# Altium PCB Count_3x7Seg_Display_pcb.PcbDoc
Units mil, origin at the board's own origin, x right, y up, seen from the top; angles counter-clockwise.
Board outline 1763 x 2600 mil, 4 copper layers (Top Layer 1, Layer 2 (PWR), Layer 3 (GND), Bottom Layer 1), stack 75.712 mil thick; 47 components, 41 nets, 162 pads, 23 vias.
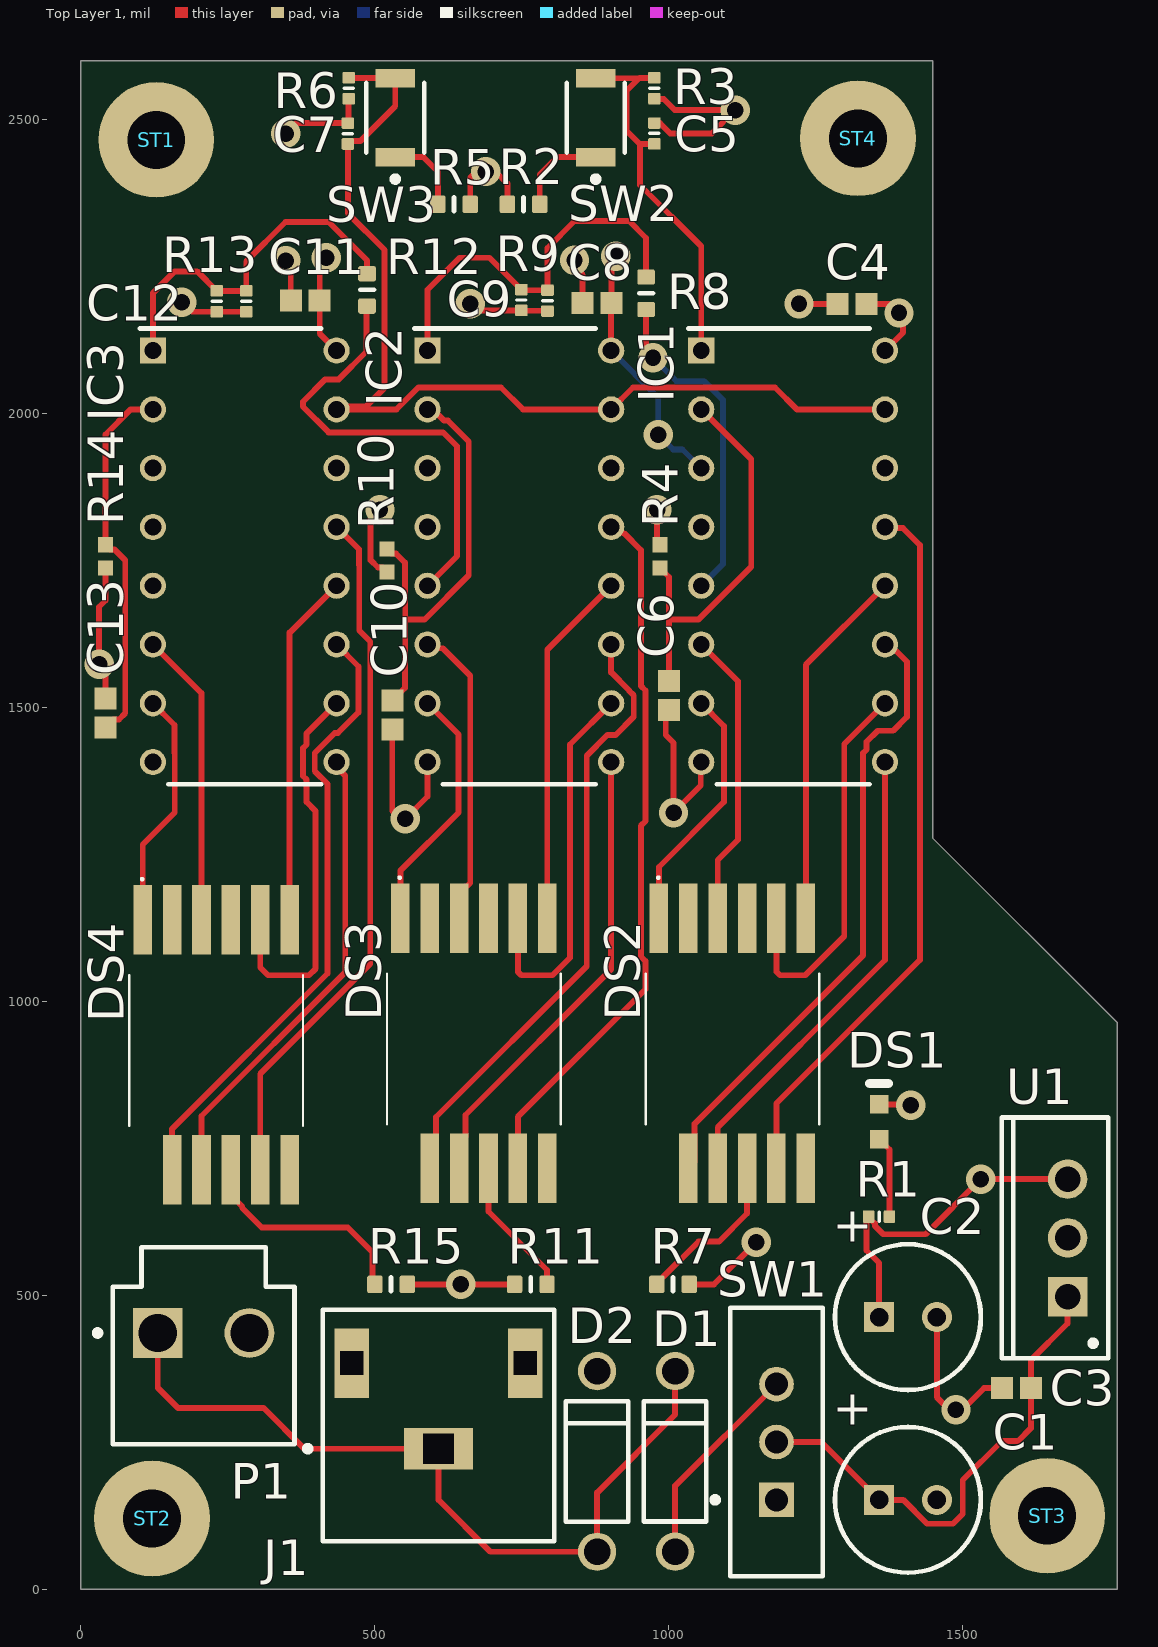
[diagram p0: Top Layer 1 view]
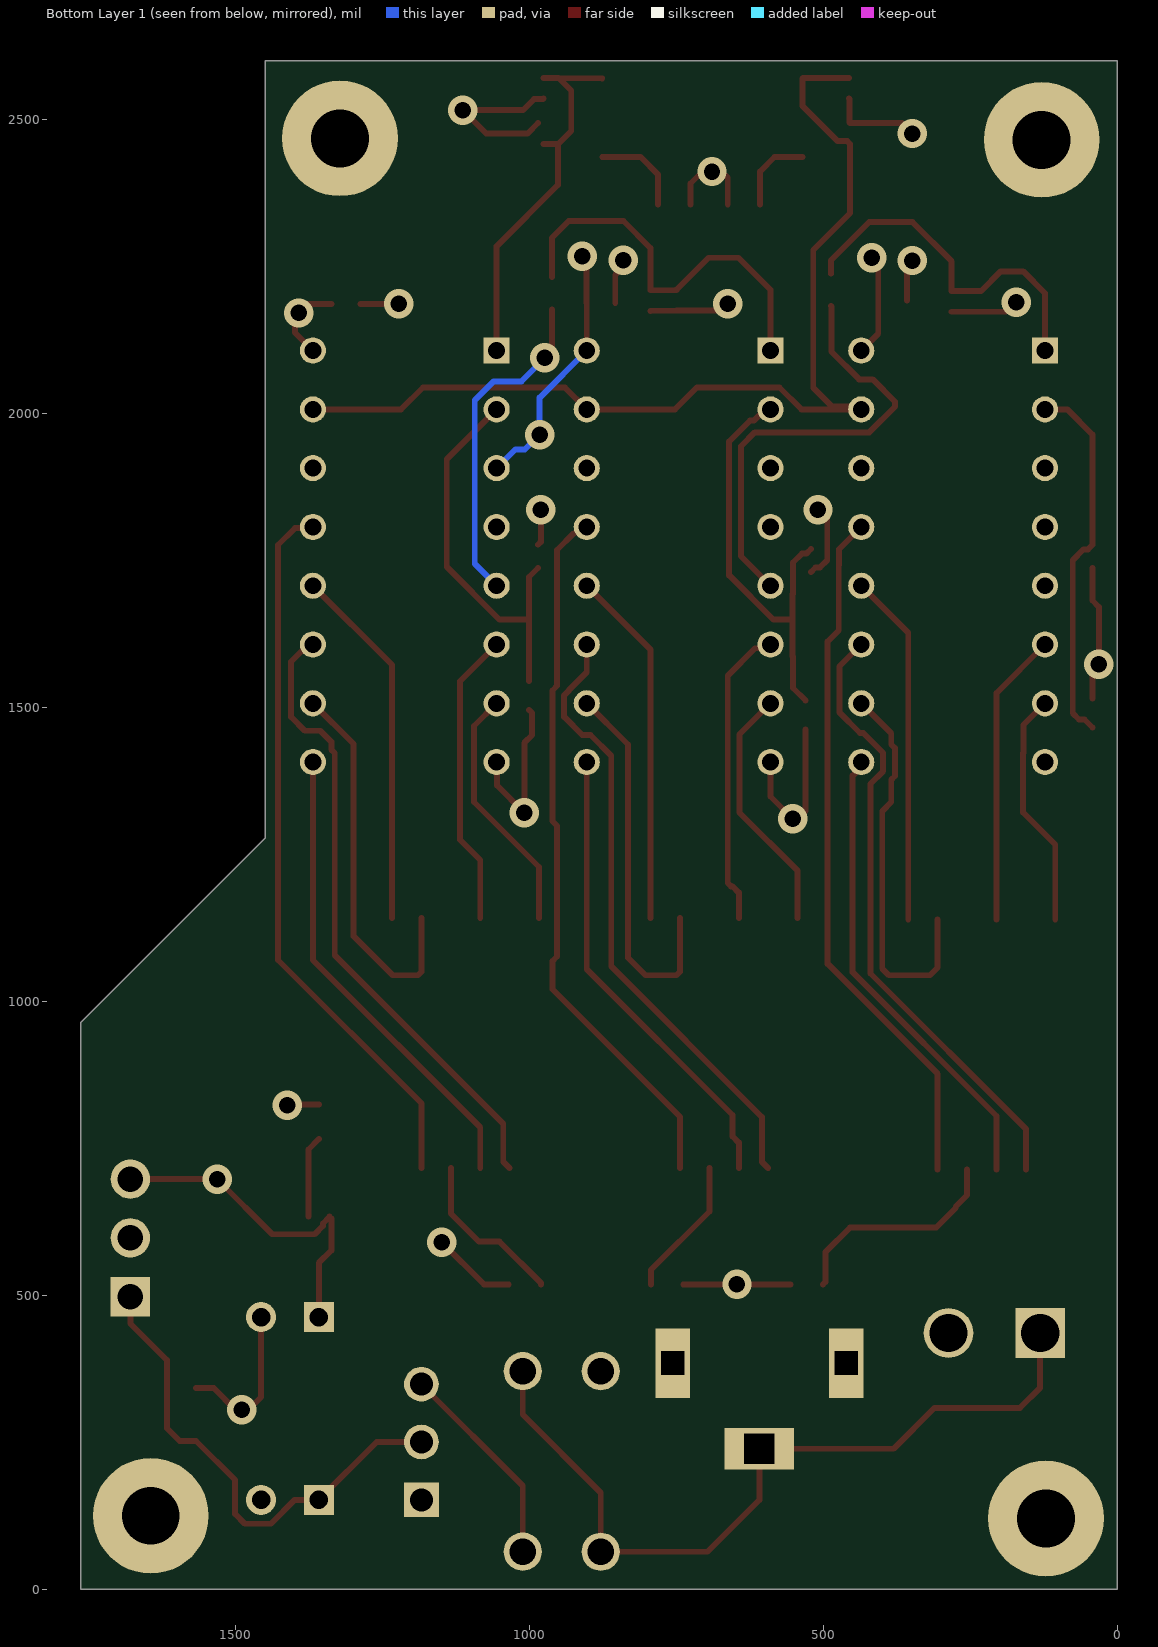
[diagram p1: Bottom Layer 1 view, seen from below]
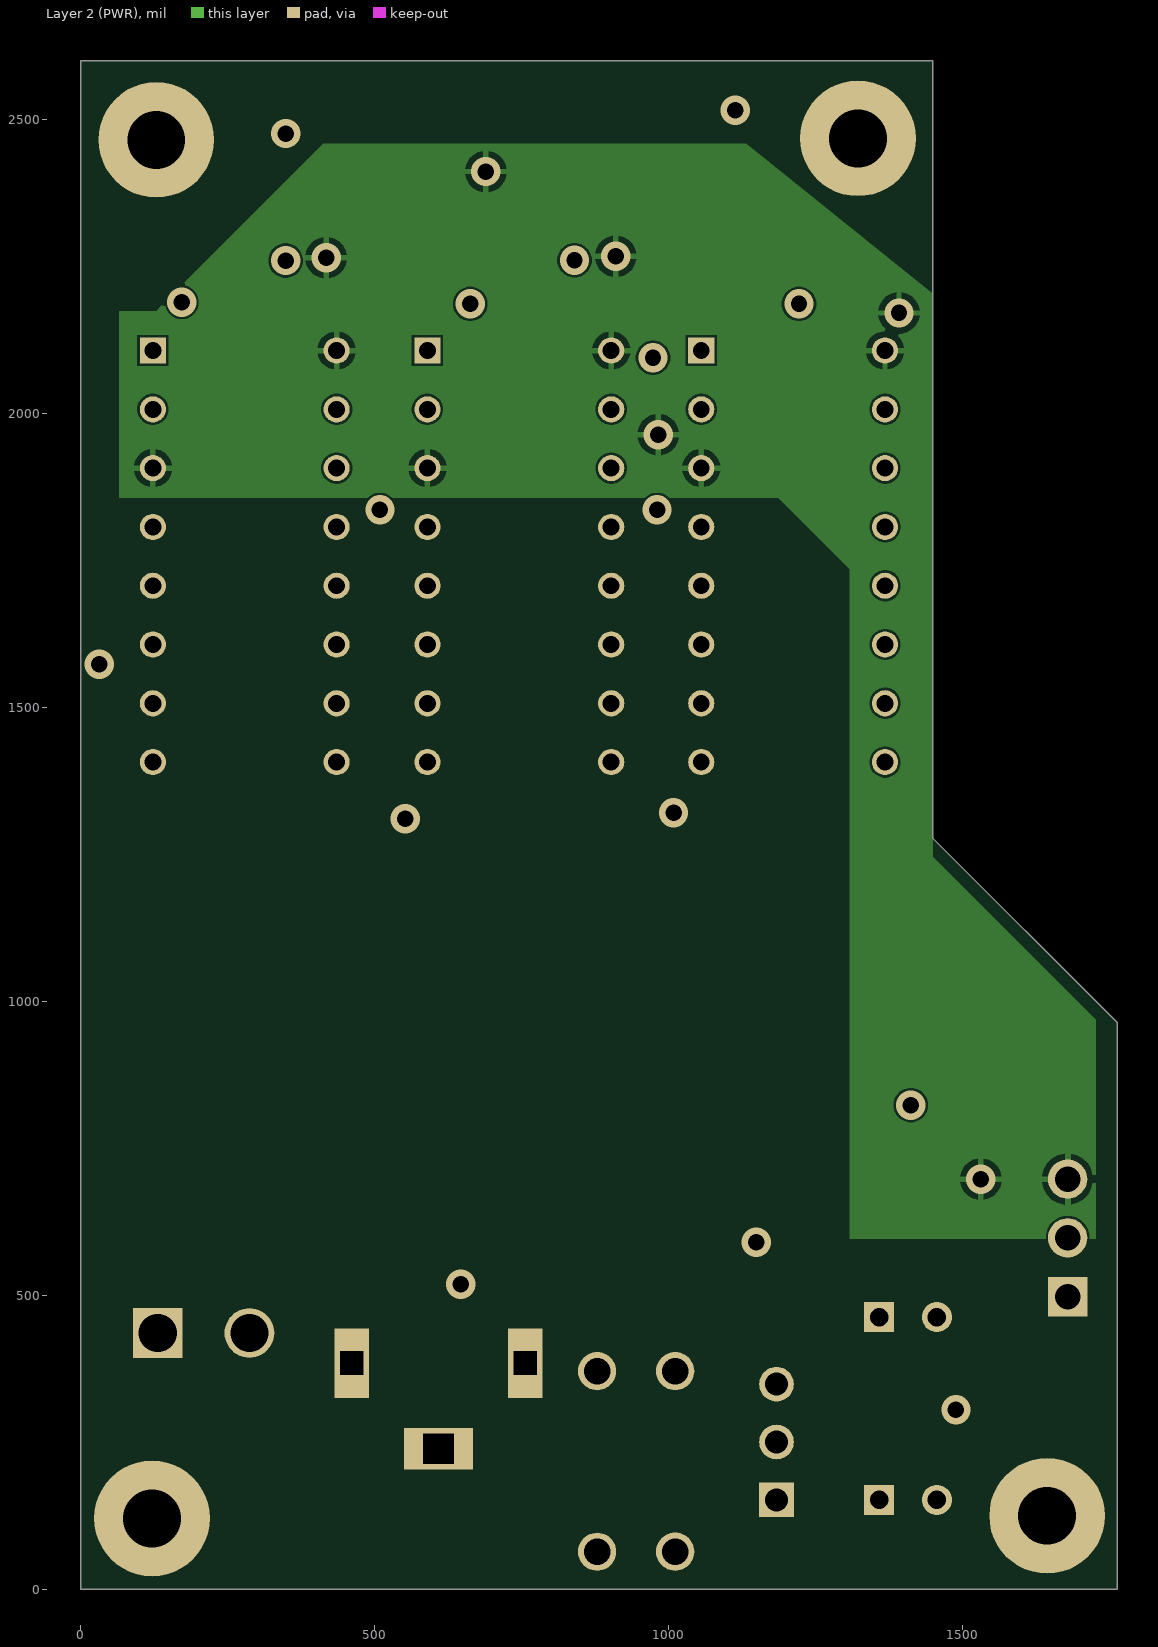
[diagram p2: Layer 2 (PWR)]
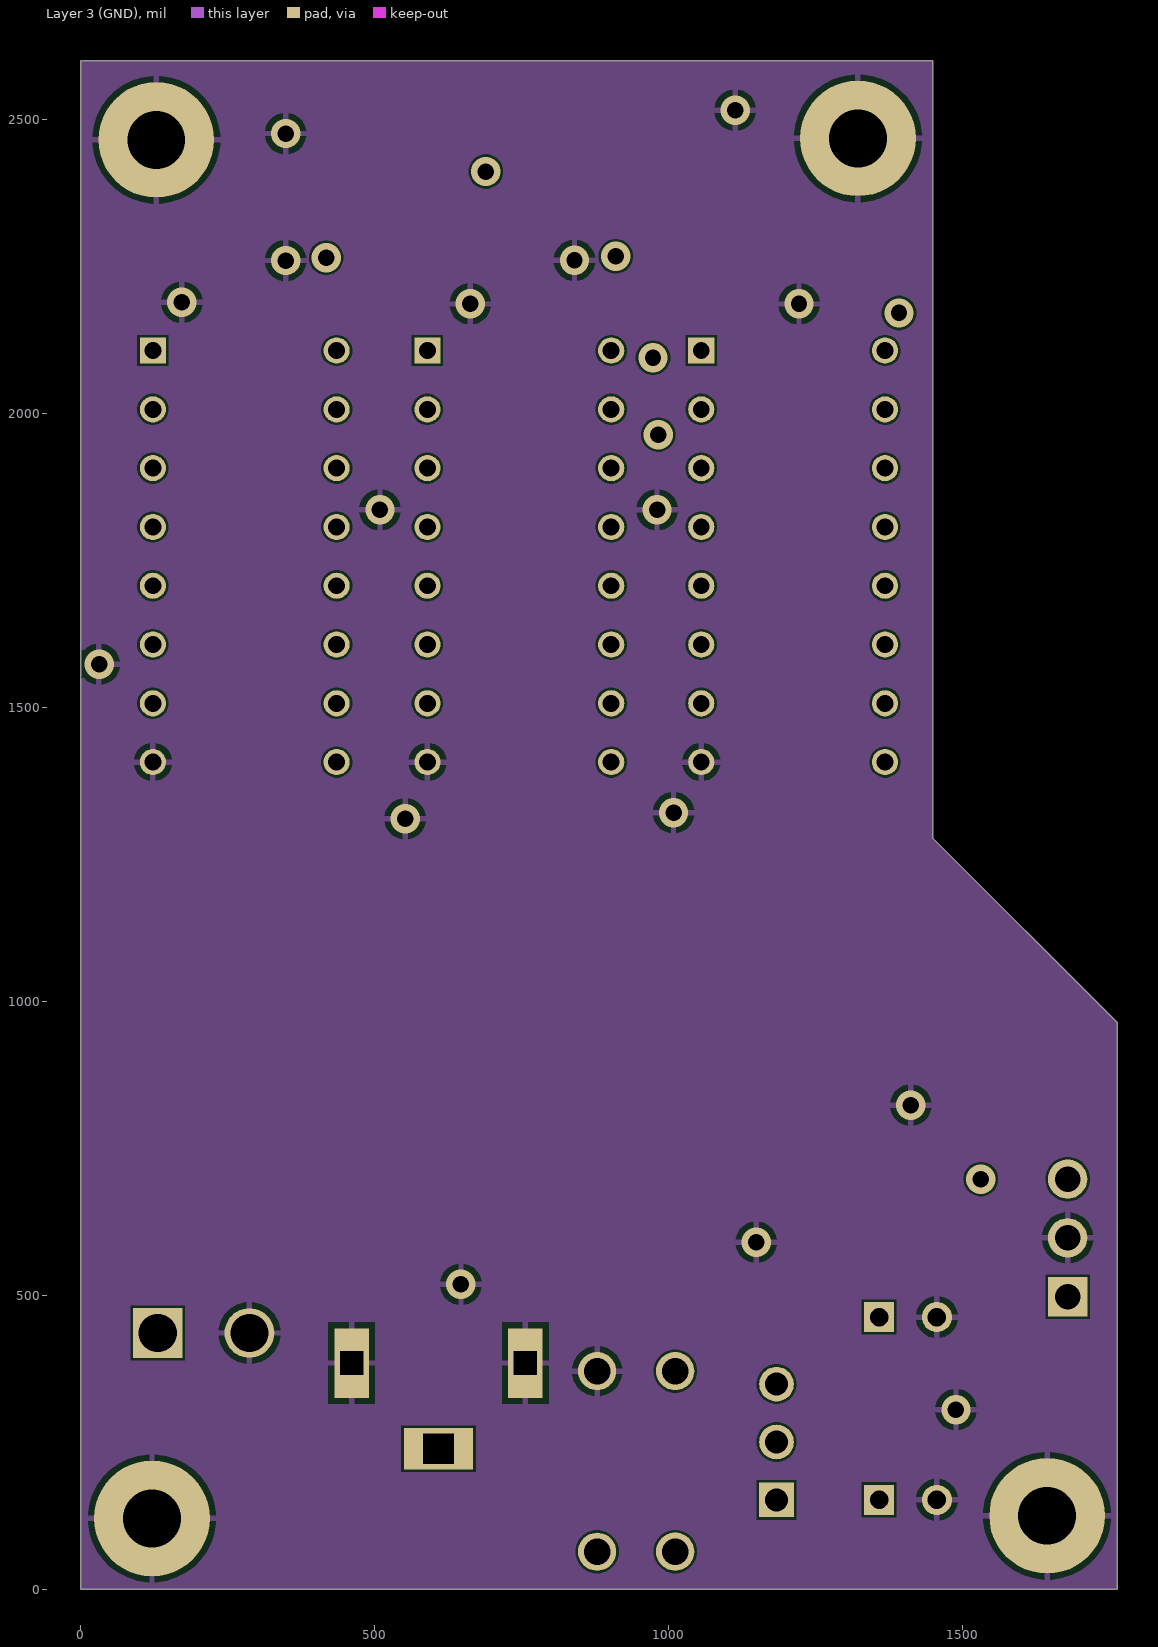
[diagram p3: Layer 3 (GND)]
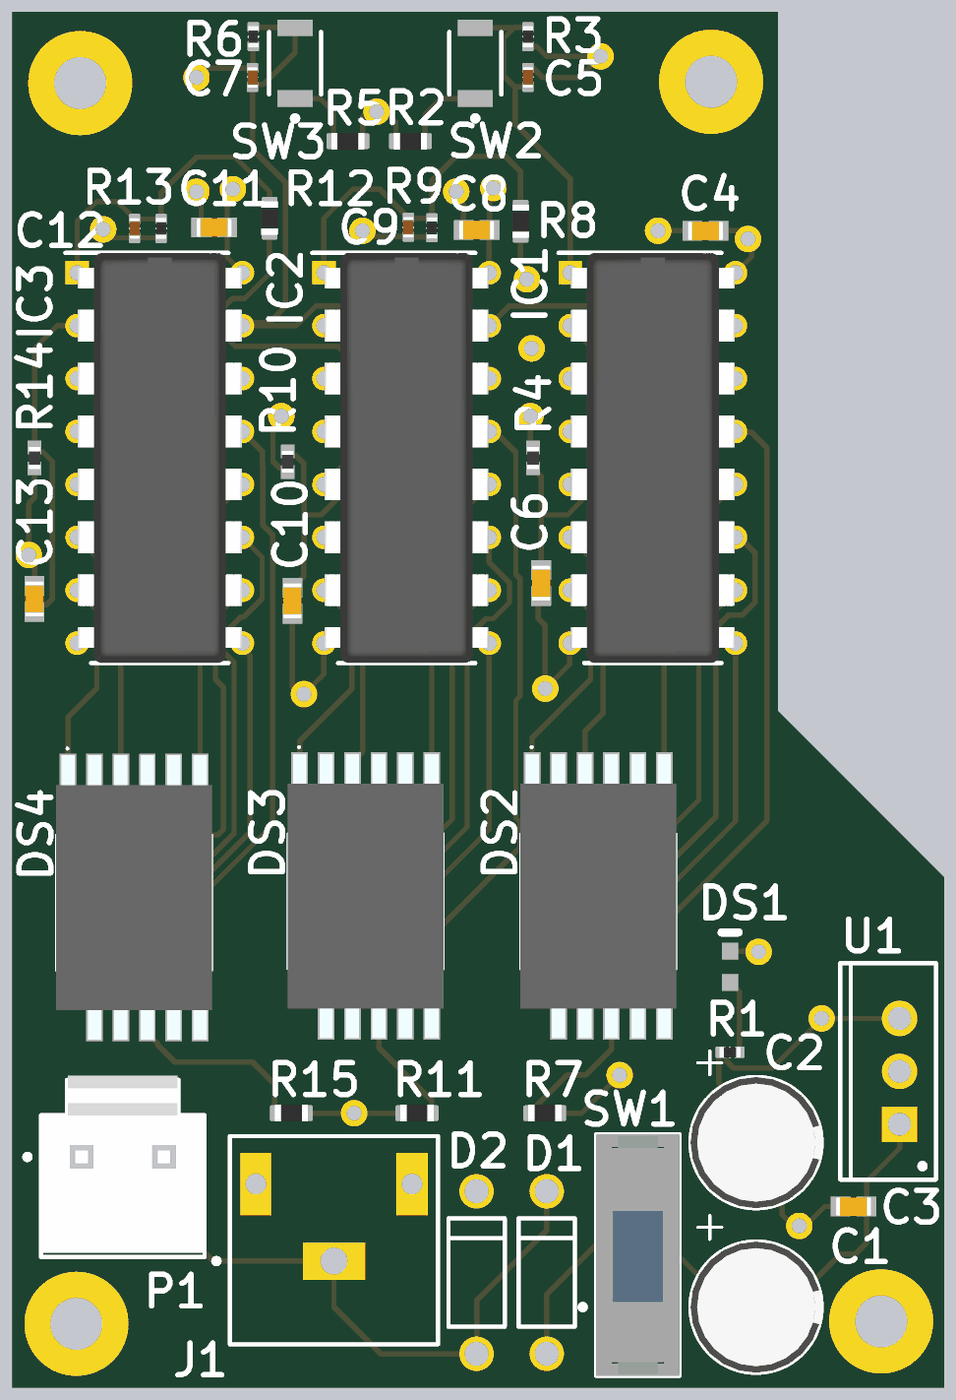
[diagram p4: 3D render of the assembled board from above, using the file's embedded part models]

## Layer stack, top to bottom
Top Solder: solder mask 0.5, Solder Resist, Dk 3.3
Top Layer 1: signal copper 1.378
Dielectric 3: prepreg 2.8, PP-006, Dk 4.1
Dielectric 1: prepreg 2.8, PP-006, Dk 4.1
Layer 2 (PWR): signal copper 1.378
Dielectric1: core 59, FR-4, Dk 4.3
Layer 3 (GND): signal copper 1.378
Dielectric 2: prepreg 2.8, PP-006, Dk 4.1
Dielectric 4: prepreg 2.8, PP-006, Dk 4.1
Bottom Layer 1: signal copper 1.378
Bottom Solder: solder mask 0.5, Solder Resist, Dk 3.3

## Board outline
1449,2600 1449,1278 1763,964 1763,0 0,0 0,2600

## Design rules (kind name [scope] priority, off if disabled: settings)
Clearance Clearance_1 [(ExistsOnLayer('Layer 2 (PWR)') Or ExistsOnLayer('Layer 3 (GND)')) vs (ExistsOnLayer('Layer 2 (PWR)') Or ExistsOnLayer('Layer 3 (GND)'))] p1: gap=4 ignorepadtopadclearanceinfootprint=FALSE sourcerule=36 cellrowname=All cellrowtype=0 cellcolname=All cellcoltype=0 innerlayers=TRUE
Clearance Clearance_2 [(ExistsOnLayer('Top Layer 1') Or ExistsOnLayer('Bottom Layer 1')) vs (ExistsOnLayer('Top Layer 1') Or ExistsOnLayer('Bottom Layer 1'))] p2: gap=4 ignorepadtopadclearanceinfootprint=FALSE sourcerule=36 cellrowname=All cellrowtype=0 cellcolname=All cellcoltype=0 outerlayers=TRUE
Clearance [All] p3: gap=10 ignorepadtopadclearanceinfootprint=FALSE except(0: Arc-Hole Track-Hole SMDPad-Hole THPad-Hole Via-Hole Fill-Hole Poly-Hole Region-Hole Text-Hole)
ComponentClearance [All] p1: gap=4 collisioncheckmode=3 verticalgap=10 showdistances=FALSE
HoleToHoleClearance [All] p1: gap=6 allowstackedmicrovias=TRUE
MinimumSolderMaskSliver [All] p1: minsoldermaskwidth=6
PlaneClearance [All] p1: clearance=6
PolygonConnect [All] p1: connectstyle=Relief reliefconductorwidth=10 reliefentries=4 polygonreliefangle="90 Angle" airgapwidth=10
RoutingCorners [All] p1: cornerstyle=45-Degree minsetback=1 maxsetback=100
RoutingVias [All] p1: holewidth=28 width=50 viastyle="Through Hole" minholewidth=28 minwidth=50 maxholewidth=28 maxwidth=50
SilkToSilkClearance [All] p1: silktosilkclearance=1
SilkToSolderMaskClearance [IsPad] p1: minsilkscreentomaskgap=1 clearancetoexposedcopper=TRUE
SolderMaskExpansion [All] p1: expansion=0 istentingtop=FALSE
Width [All] p1: maxlimit=10 minlimit=10 preferedwidth=10
23 further rules are at their usual default settings.

## Components (designator, comment, footprint, x,y, rotation, side; value= is the part's Value field where it differs from the comment)
C1 "ECA-1HM470" CAPPR55-250-1120X630X1220 1407.08,152.11 r0 top value=220µF/16V
C2 "ECA-1HM470" CAPPR55-250-1120X630X1220 1407.08,463 r0 top value=0.1µF/10V
C3 "Capacitor 100 nF +/-10% 50 V 0603" CAPC1608X90X40NL10T20 1591.53,342.32 r0 top value=100nF
C4 "Capacitor 100 nF +/-10% 50 V 0603" CAPC1608X90X40NL10T20 1311.56,2186.28 r0 top value=100nF
C5 "Capacitor 220nF +/-20% 10V 0402" CAPC0402(1005)60_L 975.7,2476.27 r270 top value=220nF
C6 "Capacitor 100 nF +/-10% 50 V 0603" CAPC1608X90X40NL10T20 1000.64,1520.5 r90 top value=100nF
C7 "Capacitor 220nF +/-20% 10V 0402" CAPC0402(1005)60_L 454.36,2476.11 r270 top value=220nF
C8 "Capacitor 100 nF +/-10% 50 V 0603" CAPC1608X90X40NL10T20 878.39,2187.84 r0 top value=100nF
C9 "Capacitor 220nF +/-20% 10V 0402" CAPC0402(1005)60_L 749.39,2193 r90 top value=220nF
C10 "Capacitor 100 nF +/-10% 50 V 0603" CAPC1608X90X40NL10T20 529.95,1487.04 r90 top value=100nF
C11 "Capacitor 100 nF +/-10% 50 V 0603" CAPC1608X90X40NL10T20 381.94,2192.4 r0 top value=100nF
C12 "Capacitor 220nF +/-20% 10V 0402" CAPC0402(1005)60_L 231.39,2190.73 r90 top value=220nF
C13 "Capacitor 100 nF +/-10% 50 V 0603" CAPC1608X90X40NL10T20 42.02,1490.5 r270 top value=100nF
D1 "1N4007" FAIR-DO-41-2 1011.14,217.55 r90 top
D2 "1N4007" FAIR-DO-41-2 878.38,217.45 r90 top
DS1 "LTST-C190GKT" LTST-C190GKT_V 1357.87,795.31 r90 top
DS2 "HDSM-281C" HDSM283L 1108.46,928.98 r0 top
DS3 "HDSM-281C" HDSM283L 668.61,928.98 r0 top
DS4 "HDSM-281C" HDSM283L 230.44,926.37 r0 top
IC1 "CD4026BE" DIP794W53P254L1930H508Q16N 1211.82,1756.98 r0 top
IC2 "CD4026BE" DIP794W53P254L1930H508Q16N 745.99,1756.98 r0 top
IC3 "CD4026BE" DIP794W53P254L1930H508Q16N 279.01,1756.98 r0 top
J1 "PJRAN1X1U01X" SWIT-PJRAN1X1U01X_V 608.56,239.13 r0 top
P1 "B2P-VH(LF)(SN)" JST-B2P-VH(LF)(SN)_V 209,380.84 r0 top
R1 "200R2J" RESC0402(1005)_L 1357.87,633.84 r0 top value=200
R2 "120R3J" RESC0603(1608)_L 753.23,2355.63 r0 top value=120
R3 "Resistor 2K +/-5 % 0402 63 mW" RESC0402(1005)_L 975.7,2553.19 r90 top value=2k
R4 "Resistor 10k +/-1% 0402 100 mW" RESC1005X40X25ML05T05 985.23,1756.98 r90 top value=10k
R5 "120R3J" RESC0603(1608)_L 634.98,2355.63 r180 top value=120
R6 "Resistor 2K +/-5 % 0402 63 mW" RESC0402(1005)_L 455.98,2553.19 r90 top value=2k
R7 "120R3J" RESC0603(1608)_L 1007.45,518.63 r0 top value=120
R8 "120R3J" RESC0603(1608)_L 961.61,2204.41 r270 top value=120
R9 "Resistor 2K +/-5 % 0402 63 mW" RESC0402(1005)_L 793.88,2191.86 r90 top value=2k
R10 "Resistor 10k +/-1% 0402 100 mW" RESC1005X40X25ML05T05 520.98,1749.74 r270 top value=10k
R11 "120R3J" RESC0603(1608)_L 765.62,518.63 r180 top value=120
R12 "120R3J" RESC0603(1608)_L 486.97,2210.12 r270 top value=120
R13 "Resistor 2K +/-5 % 0402 63 mW" RESC0402(1005)_L 281.59,2190.73 r90 top value=2k
R14 "Resistor 10k +/-1% 0402 100 mW" RESC1005X40X25ML05T05 42.02,1756.98 r270 top value=10k
R15 "120R3J" RESC0603(1608)_L 527.87,518.63 r180 top value=120
ST1 "PTH-M2D5X5" PTH-M2D5X5 128.51,2465.44 r0 top
ST2 "PTH-M2D5X5" PTH-M2D5X5 121.27,120.58 r0 top
ST3 "PTH-M2D5X5" PTH-M2D5X5 1643.81,125.03 r0 top
ST4 "PTH-M2D5X5" PTH-M2D5X5 1322,2467.93 r0 top
SW1 "EG1218" ESWI-EG1218_V 1183.46,250.53 r90 top
SW2 "B3U-1000P" OMRON-B3U-1000_V 875.91,2503 r90 top
SW3 "B3U-1000P" OMRON-B3U-1000_V 534.97,2503 r90 top
U1 "L7805CV" TO220 1678.59,597.73 r90 top

## Footprints (in the part's own frame and the unit in brackets; to place one, negate y for a bottom-side part, rotate by r counter-clockwise, add the part's x,y. Pads: shape width x height; smd on the part's side, far side on the other; paste and mask are expansions set on the pad)
CAPC0402(1005)60_L [mm] "Chip Capacitor, Body 1.0x0.5mm, Height 0.6mm, IPC High Density"
  rrect25% 0.5x0.55 smd: 1(-0.45,0) 2(0.45,0)
  silkscreen extent 0,-0.2 0,0.2, body extent -0.5,-0.25 0.5,0.25, height 0.6
CAPC1608X90X40NL10T20 [mm] "Chip Capacitor, 2-Leads, Body 1.70x0.90mm, IPC Medium Density"
  rect 0.95x0.95 smd: 1(-0.625,0) 2(0.625,0)
  body extent -0.85,-0.45 0.85,0.45, height 0.9
CAPPR55-250-1120X630X1220 [mm] "THD, 2-Leads, Dia 6.3mm, Pin Spacing 2.5mm"
  rect 1.3x1.3 hole 0.8: 1(-1.25,0)
  round 1.3 hole 0.8: 2(1.25,0)
  silkscreen extent -3.15,-3.15 3.15,3.15, body extent -3.15,-3.15 3.16,3.15, height 12.21
DIP794W53P254L1930H508Q16N [mm]
  rect 1.13x1.13 hole 0.73: 1(-3.97,8.89)
  round 1.13 hole 0.73: 2(-3.97,6.35) 3(-3.97,3.81) 4(-3.97,1.27) 5(-3.97,-1.27) 6(-3.97,-3.81) 7(-3.97,-6.35) 8(-3.97,-8.89) 9(3.97,-8.89) 10(3.97,-6.35) 11(3.97,-3.81) 12(3.97,-1.27) 13(3.97,1.27) 14(3.97,3.81) 15(3.97,6.35) 16(3.97,8.89)
  silkscreen extent -4.53,-9.84 3.3,9.84, body extent -3.94,-9.84 3.94,9.84, height 5.27
ESWI-EG1218_V [mm] "THD, 3-Leads, Body 11.6x4mm, Pitch 2.5mm"
  rect 1.5x1.5 hole 1: 1(-2.5,0)
  round 1.5 hole 1: 2(0,0) 3(2.5,0)
  silkscreen extent -5.8,-2 5.8,2.77, body extent -5.8,-2 5.8,2, height 7.4
FAIR-DO-41-2 [mm] "THD, 2-Leads, Body 5.2x2.72mm, Pin Spacing 7.8mm"
  round 1.65 hole 1.15: 1(-3.9,0) 2(3.9,0)
  silkscreen extent -2.6,-1.35 2.6,1.35, body extent -4.29,-1.17 4.29,1.17, height 2.35
HDSM283L [mm]
  rect 0.8x3 smd: 1(-3.175,5.4) 2(-1.905,5.4) 3(-0.635,5.4) 4(0.635,5.4) 5(1.905,5.4) 6(3.175,5.4) 7(3.175,-5.4) 8(1.905,-5.4) 9(0.635,-5.4) 10(-0.635,-5.4) 11(-1.905,-5.4)
  silkscreen extent -3.75,-3.5 3.75,7.2, body extent -3.75,-6.82 3.75,6.82, height 3.25
JST-B2P-VH(LF)(SN)_V [mm] "THD, 2-Leads, Body 8.5x7.86mm, Pitch 3.96mm"
  rect 2.15x2.15 hole 1.65: 1(-1.98,1.4)
  round 2.15 hole 1.65: 2(1.98,1.4)
  silkscreen extent -4.7,-3.4 3.93,5.1, body extent -3.93,-3.2 3.93,5.3, height 10.9
LTST-C190GKT_V [mm] "SMD, 2-Leads, Body 1.6x0.8mm"
  rect 0.8x0.8 smd: 1(-0.75,0) 2(0.75,0)
  silkscreen extent 1.65,-0.4 1.65,0.4, body extent -0.8,-0.4 0.8,0.4, height 0.9
OMRON-B3U-1000_V [mm] "SMD, 2-Leads, Body 3x2.5mm"
  rect 0.8x1.7 smd: 1(-1.7,0) 2(1.7,0)
  silkscreen extent -2.77,-1.25 1.5,1.25, body extent -1.5,-1.25 1.5,1.25, height 1.75
PTH-M2D5X5 [mm]
  round 5 hole 2.5: 1(0,0)
RESC0402(1005)_L [mm] "Chip Resistor, Body 1.0x0.5mm, IPC High Density"
  rrect25% 0.5x0.55 smd: 1(-0.45,0) 2(0.45,0)
  silkscreen extent 0,-0.2 0,0.2, body extent -0.5,-0.25 0.5,0.25, height 0.3
RESC0603(1608)_L [mm] "Chip Resistor, Body 1.6x0.8mm, IPC High Density"
  rrect25% 0.66x0.76 smd: 1(-0.7,0) 2(0.7,0)
  silkscreen extent 0,-0.3 0,0.3, body extent -0.8,-0.4 0.8,0.4, height 0.45
RESC1005X40X25ML05T05 [mm] "Chip Resistor, 2-Leads, Body 1.05x0.55mm, IPC Low Density"
  rect 0.65x0.65 smd: 1(-0.5,0) 2(0.5,0)
  body extent -0.53,-0.28 0.53,0.28, height 0.4
SWIT-PJRAN1X1U01X_V [mm] "Jack, 3-Leads, Body 19.5x10mm"
  rect 3x1.8 hole 1.3 square paste-2539.97: 1(0,0)
  rect 1.5x3 hole 1 square paste-2539.97: 2(-3.75,3.7) 3(3.75,3.7)
  silkscreen extent -5.77,-4 5,6, body extent -5,-13.5 5,6, height 13
TO220 [mm] "TO, Thru-Hole, Vertical, Heatsink Mounted; 3 In-Line Leads; Pitch 2.54 mm"
  rect 1.7x1.7 hole 1.1: 1(-2.54,0)
  round 1.7 hole 1.1: 2(0,0) 3(2.54,0)
  silkscreen extent -5.2,-1.75 5.2,2.85, body extent -5.25,-1.8 5.25,2.9, height 19.7

## Part data
C1 C2: library part CMP-001-00031-7, "Aluminum Electrolytic Capacitor, 47 uF, +/-20%, 50 V, -40 to 85 degC, 2-Pin THD, RoHS, Bulk", Capacitor Type=Electrolytic, Case/Package=Radial, Manufacturer=Panasonic, Max Operating Temperature=85°C, Min Operating Temperature=-40°C, Package Description="2-Pin Radial Lead, Dia 6.3 mm, Height 12.2 mm", Package Quantity=200, Package Reference=CAPPR55-250-1120X630X1220, Ripple Current=130mA, Tolerance=20%, Voltage Rating=50V, Datasheet URL=https://industrial.panasonic.com/cdbs/www-data/pdf/RDF0000/DMF0000COL72.pdf, Datasheet Version=Apr-16, Diameter=6.3mm, Lead Pitch=2.5mm, Manufacturer URL=http://www.panasonic.com/, Mounting Technology=TH, Packaging=Bulk, Pins=2, Ripple Current (AC)=130mA, RoHS Compliant=True
C3 C4 C6 C8 C10 C11 C13: library part CMP-001-00017-6, "Chip Capacitor, 100 nF, +/- 10%, 50 V, 0603 (1608 Metric)", Capacitor Type=Ceramic, Case/Package=0603, Max Operating Temperature=125°C, Min Operating Temperature=-55°C, Tolerance=10%, Voltage Rating=50V, Mounting Technology=SM, Pins=2, RoHS Compliant=True
C5 C7 C9 C12: library part CMP-001-00057-3, "Chip Capacitor, 220nF +/-20%, 10V, 0402, Thickness 0.6 mm", Case/Package=0402, Max Operating Temperature=85°C, Min Operating Temperature=-55°C, Tolerance=10%, Voltage Rating=10V, Mounting Technology=SMT, Pins=2
D1 D2: library part CMP-004-00007-2, "General Purpose Rectifier, 1.1 V, 1.0 A, -55 to 175 degC, 2-Pin DO-41, RoHS, Tape and Reel", Case/Package=DO-41-2, Forward Current=1A, Forward Voltage=1.1V, Manufacturer=Fairchild, Max Operating Temperature=175°C, Max Surge Current=30A, Min Operating Temperature=-55°C, Package Description="2-Pin Axial Lead, Dia 2.375 mm, Body Length 4.63 mm", Package Quantity=5000, Package Version="Rev. 2, 09/2008", Peak Reverse Current=5uA, Datasheet URL=https://www.fairchildsemi.com/datasheets/1N/1N4007.pdf, Datasheet Version="Rev. 1.1.0, 11/2014", Elements=1, Manufacturer URL=https://www.fairchildsemi.com/, Mounting Technology=TH, Package Reference=DO-41-2, Package URL=http://www.fairchildsemi.com/dwg/DO/DO41A.pdf, Packaging=TapeandReel, Pins=2, RoHS Compliant=True
DS1: library part CMP-007-00022-2, "LED Uni-Color Green, 100 mW, 30 mA, -55 to 85 degC, 2-Pin SMD, RoHS, Tape and Reel", Case/Package=0603, Colour=Green, Forward Current=20mA, Forward Voltage=2.1V, Manufacturer=Lite-On, Max Operating Temperature=85°C, Min Operating Temperature=-55°C, Package Description="2-Pin Surface Mount Device, Body 1.6 x 0.8 mm", Package Quantity=3000, Package Reference=C190GKT, Power=100mW, Datasheet URL=http://datasheet.octopart.com/LTST-C190GKT-Lite-On-datasheet-158530.pdf, Datasheet Version=Dec-06, Illumination Colour=Green, Lens Style=Clear, Luminous Intensity=6mcd, Manufacturer URL=http://www.us.liteon.com/, Mounting Technology=SM, Nominal Vf=2.1V, Packaging=TapeandReel, Pins=2, RoHS Compliant=True, Viewing Angle=130degrees
DS2 DS3 DS4: "Display", Manufacturer_Name="Avago Technologies", Mouser Part Number=630-HDSM-281C, Datasheet Link=https://datasheet.datasheetarchive.com/originals/distributors/SFDatasheet-4/sf-00083599.pdf, Height=3.15mm, Manufacturer_Part_Number=HDSM-281C, Mouser Price/Stock=https://www.mouser.co.uk/ProductDetail/Broadcom-Avago/HDSM-281C?qs=NCV3C3qdz%2FDIiI0K2Ja0mg%3D%3D
IC1 IC2 IC3: "Integrated Circuit", Manufacturer_Name="Texas Instruments", Mouser Part Number=595-CD4026BE, Arrow Part Number=CD4026BE, Arrow Price/Stock=https://www.arrow.com/en/products/cd4026be/texas-instruments?region=nac, Datasheet Link=http://www.ti.com/lit/ds/symlink/cd4026b.pdf, Height=5.08mm, Manufacturer_Part_Number=CD4026BE, Mouser Price/Stock=https://www.mouser.co.uk/ProductDetail/Texas-Instruments/CD4026BE?qs=bkMXpVdiF42nXhwyXNpecA%3D%3D
J1: library part CMP-002-00008-2, "Female Phono Jack, 3 Position, Height 13 mm, Tail Length 4 mm, RoHS, Bulk", Case/Package=Metal, Colour=Black, Current Rating=2A, Manufacturer=Switchcraft, Max Operating Temperature=85°C, Max Voltage Rating (DC)=34V, Min Operating Temperature=-25°C, Package Description="Female Phono Jack, 3 Position, Height 13 mm, Tail Length 4 mm", Package Quantity=1, Connector Type=Audio, Contact Material=Copper, Contact Plating=Silver, Datasheet URL=http://www.conxall.com/Drawings/pjran1x1u__x_series_cd.pdf, Datasheet Version="Rev. A, 01/2006", Gender=Female, Manufacturer URL=http://www.switchcraft.com/, Max Current Rating=2A, Mounting Technology=TH, Package Reference=PJRAN1X1U01X, Pins=1, RoHS Compliant=True, Shielding=Unshielded, Voltage Rating=34V
P1: library part CMP-002-00025-2, "Male Header, Pitch 3.96 mm, 1 x 2 Position, Height 10.9 mm, Tail Length 3.7 mm, -25 to 85 degC, RoHS, Bulk", Manufacturer=JST, Max Operating Temperature=85°C, Min Operating Temperature=-25°C, Package Description="Male Header, Pitch 3.96 mm, 1 x 2 Position, Height 10.9 mm, Tail Length 3.7 mm", Case/Package=B2P-VH(LF)(SN), Connector Type=Header, Datasheet URL=http://www.jst-mfg.com/product/pdf/eng/eVH.pdf, Datasheet Version=May-16, Gender=Male, Manufacturer URL=http://www.jst.com/home2.html, Mounting Technology=TH, Package Reference=B2P-VH(LF)(SN), RoHS Compliant=Unknown
R1: library part CMP-009-00079-2, "200R 0.063W 5% 0402 (1005 Metric)  SMD", Case/Package=0402, Power=63mW, Tolerance=5%, Mounting Technology=SMT, Pins=2
R2 R5 R7 R8 R11 R12 R15: library part CMP-009-00069-2, "120R 0.1W 5% 0603 (1608 Metric)  SMD", Case/Package=0603, Power=100mW, Tolerance=5%, Mounting Technology=SMT, Pins=2
R3 R6 R9 R13: library part CMP-009-00138-3, "Chip Resistor, 2 kOhms, +/-5 %, 63 mW, -55 to 155 degC, 0402", Case/Package=0402, Max Operating Temperature=155°C, Min Operating Temperature=-55°C, Power=63mW, Tolerance=5%, Pins=2
R4 R10 R14: library part CMP-009-00015-5, "Chip Resistor, 10 KOhm, +/- 1%, 0.1 W, -55 to 155 degC, 0402 (1005 Metric)", Case/Package=0402, Max Operating Temperature=155°C, Min Operating Temperature=-55°C, Power=100mW, Tolerance=1%, Voltage Rating=50V, Mounting Technology=SM, Pins=2, RoHS Compliant=True
ST1 ST2 ST3 ST4: library part CMP-00028-00004-2, "M2 PTH (2.5mm), 5mm pad", Pins=1
SW1: library part CMP-011-00006-2, "Slide Switch, SPDT, 500 V, -20 to 70 degC, 3-Pin THD, RoHS, Bulk", Contact Current Rating=200mA, Manufacturer=E-Switch, Max Operating Temperature=70°C, Min Operating Temperature=-20°C, Operating Force=250gf, Package Description="3-Pin Through Hole Device, Body 11.6 x 4 mm, Pitch 2.5 mm", Package Quantity=1000, Voltage Rating (AC)=30V, Case/Package=EG1218, Contact Finish=Silver, Contact Material=Copper, Contact Plating=Silver, Current Rating=200mA, Datasheet URL=https://www.e-switch.com/system/asset/product_line/data_sheet/119/EG.pdf, Datasheet Version=Oct-15, Manufacturer URL=http://www.e-switch.ch/en/, Mounting Technology=TH, Package Reference=EG1218, Packaging=Bulk, Pins=3, RoHS Compliant=True, Throw Configuration=SPDT, Voltage Rating (DC)=30V
SW2 SW3: library part CMP-011-00000-2, "Tactile Switch, SPST-NO, 0.05 A, 12 V, -25 to 70 degC, 2-Pin SMD, RoHS, Tape and Reel", Case/Package=B3U-1000, Contact Current Rating=50mA, IP Rating=IP40, Manufacturer="Omron Electronic Components", Max Contact Resistance=100mohm, Max Operating Temperature=70°C, Max Voltage Rating (DC)=12V, Min Operating Temperature=-25°C, Operating Force=153gf, Package Description="2-Pin Surface Mount Device, Body 3 x 2.5 mm", Package Quantity=3500, Resistance=0.1Ohm, Contact Material=Silver, Current Rating=50mA, Datasheet URL=http://www.omron.com/ecb/products/pdf/en-b3u.pdf, Datasheet Version=Jan-15, Manufacturer URL=http://www.omron.com/, Max Current Rating=50mA, Mounting Technology=SM, Package Reference=B3U-1000, Packaging=TapeandReel, RoHS Compliant=True, Throw Configuration=SPST, Voltage Rating=12V, Voltage Rating (DC)=12V
U1: library part CMP-019-00018-3, "Positive Voltage Regulator IC, 1.5 A, 5 V, 0 to 125 degC, 3-Pin TO-220, RoHS, Tube", Case/Package=TO-220, Dropout Voltage=2V, Manufacturer=STMicroelectronics, Max Input Voltage=35V, Max Operating Temperature=125°C, Max Ouput Current=1.5A, Max Supply Voltage=20V, Min Input Voltage=7V, Min Operating Temperature=0°C, Min Supply Voltage=8V, Nominal Output Voltage=5V, Package Quantity=50, Datasheet URL=https://datasheet.ciiva.com/15111/getdatasheetpartid-44136-15111027.pdf, Datasheet Version="Rev 30, 09/2012", Manufacturer URL=http://www.st.com/, Mounting Technology=TH, Output Current=1.5A, Output Voltage=5V, Outputs=1, Packaging=Rail/Tube, Pins=3, RoHS Compliant=True

## Via types
v1: diameter 50, hole 28, Top Layer 1 to Bottom Layer 1, 23 vias

## Nets (pads, with @x,y where several pads share a name; then routed paths per layer and width w, separated by ;. In a path a pad name is that pad's centre, name@x,y a point inside that pad or via, vN(x,y) a via of type N, cw(c..) or ccw(c..) an arc to the next point about the centre after c; other vN are vias at no path point)
GND: C1.2 C2.2 C3.1 C4.1 C5.1 C6.1 C7.1 C8.1 C9.1 C10.1 C11.1 C12.1 C13.1 D2.2 DS1.2 IC1.8 IC2.8 IC3.8 J1.2 J1.3 P1.2 R3.1 R4.2 R6.1 R7.2 R9.1 R10.2 R11.2 R13.1 R14.2 R15.1 ST1.1 ST2.1 ST3.1 ST4.1 U1.2 | length 2576.1
  Top Layer 1 w10: C13.1 42.02,1570.66 31.19,1581.48 31.19,1670.92 42.02,1681.75 R14.2 ; v1(172,2189) 173.68,2189 189.67,2173.01 C12.1 R13.1 ; v1(348.47,2260.12) 357.33,2251.26 C11.1 ; v1@348.47,2474.42 v1(348.47,2476.11) 366.19,2493.83 C7.1 455.17,2494.64 455.17,2534.66 R6.1 ; v1(509,1836) 493.18,1820.18 493.18,1750.42 505.75,1737.85 513.18,1737.85 R10.2 ; C10.1 529.95,1324.25 543.52,1310.67 v1(551.8,1310.67) 589.69,1348.56 IC2.8 ; R15.1 v1(646.75,518.63) R11.2 ; v1(662.53,2186.28) 673.53,2175.29 C9.1 749.96,2174.72 793.31,2174.72 R9.1 ; v1(839.87,2260.46) 839.87,2249.63 853.78,2235.72 C8.1 ; R3.1 976.41,2534.76 991.69,2534.76 1010.45,2516 v1(1113,2516) 1073.27,2476.27 1002.85,2476.27 C5.1@985.14,2493.99 ; v1(980.31,1836) 980.31,1781.59 R4.2 ; C6.1 995.13,1490.39 995.13,1452.94 1008.37,1439.71 v1(1008.37,1321) 1054.69,1367.31 1054.69,1406.15 IC1.8 ; R7.2 1077.12,518.63 v1(1149.02,590.53) ; v1@1218.06,2182.56 v1(1221.78,2186.28) C4.1 ; DS1.2 1411.3,824.84 v1@1411.35,824.79 ; C2.2 1456.29,326.83 1477.53,305.6 v1(1488.76,305.6) 1499.99,305.6 1536.72,342.32 C3.1
  Bottom Layer 1 w10: ST2.1 126.69,120.58 ST2.1@131.05,124.94
  other v1: 1411.94,823.62 31.19,1573.65
NetC1_1: C1.1 C3.2 SW1.2 U1.1 | length 841
  Top Layer 1 w10: SW1.2 1259.44,250.53 C1.1 1398.89,152.11 1439.48,111.51 1483.8,111.51 1500.35,128.07 1500.35,185.79 1566.92,252.36 1594.61,252.36 1616.14,273.89 C3.2 1616.14,389.79 1678.59,452.24 U1.1
NetC5_2: C5.2 IC1.1 R3.2 SW2.2 | length 649.4
  Top Layer 1 w10: SW2.2 876.18,2570.2 949.52,2570.2 ; C5.2 951.46,2458.55 ; R3.2 950.23,2570.9 949.52,2570.2 ; IC1.1 1055.52,2284.47 951.46,2388.53 951.46,2458.55 ; 949.52,2570.2 928.68,2549.35 928.68,2480.35 950.47,2458.55 951.46,2458.55
NetC6_2: C6.2 IC1.2 R4.1 | length 678.5
  Top Layer 1 w10: R4.1 1000.64,1721.88 1000.64,1649.36 ; C6.2 1000.64,1649.36 ; IC1.2 1140.45,1922.05 1140.45,1739.25 1050.56,1649.36 1000.64,1649.36
NetC7_2: C7.2 IC1.15 IC2.15 IC3.15 R6.2 SW3.2 | length 1753.7
  Top Layer 1 w10: IC3.15 IC3.15@449.98,2006.98 ; R6.2 534,2570.9 SW3.2 534.97,2522.68 475.52,2463.24 459.2,2463.24 C7.2 454.36,2340.69 516.93,2278.12 516.93,2043.49 485.76,2012.32 451.24,2012.32 449.98,2011.06 IC3.15@449.98,2006.98 ; IC1.15 1218.06,2006.98 1180.82,2044.23 939.54,2044.23 IC2.15 752.23,2006.98 714.99,2044.23 574.27,2044.23 537.02,2006.98 IC3.15@449.98,2006.98
NetC9_2: C9.2 IC2.1 R8.1 R9.2 | length 689.4
  Top Layer 1 w10: IC2.1 589.69,2210.37 644.21,2264.89 695.22,2264.89 C9.2 ; C9.2@749.39,2209.58 R9.2 793.88,2281.22 839.87,2327.21 932.79,2327.21 961.61,2298.39 R8.1
NetC10_2: C10.2 IC2.2 R10.1 | length 744
  Top Layer 1 w10: R10.1 528.77,1761.63 536.21,1761.63 551.31,1746.53 551.31,1693.15 552,1692.45 552,1649.36 ; C10.2 551.31,1533.01 551.31,1586.39 552,1587.08 552,1649.36 ; IC2.2 599.03,2006.98 618.16,1987.85 624.58,1987.85 660,1952.43 660,1724.62 584.74,1649.36 552,1649.36
NetC12_2: C12.2 IC3.1 R12.1 R13.2 | length 618.8
  Top Layer 1 w10: IC3.1 122.71,2204.5 159.96,2241.74 198.09,2241.74 C12.2 R13.2 281.59,2258.76 348.47,2325.64 421.78,2325.64 486.97,2260.46 R12.1
NetC13_2: C13.2 IC3.2 R14.1 | length 634.4
  Top Layer 1 w10: C13.2 55.72,1479.6 65.12,1479.6 75.72,1490.2 75.72,1750.4 57.24,1768.87 49.81,1768.87 R14.1 42.02,1964.03 84.97,2006.98 IC3.2
NetD1_1: D1.1 SW1.3 | length 356.3
  Top Layer 1 w10: D1.1 1011.14,176.12 1183.46,348.45 SW1.3
NetD1_2: D1.2 D2.1 J1.1 P1.1 | length 1369.1
  Top Layer 1 w10: P1.1 131.05,342.88 165.27,308.65 310.8,308.65 380.31,239.13 J1.1 608.56,152.11 696.76,63.91 D2.1 878.38,164.4 1011.14,297.15 D1.2
NetDS1_1: DS1.1 R1.2 | length 139.3
  Top Layer 1 w10: DS1.1 1375.58,748.07 R1.2
NetDS2_1: DS2.1 IC1.7 | length 427.1
  Top Layer 1 w10: DS2.1 983.46,1228.46 1094,1339 1094,1468.5 IC1.7
NetDS2_3: DS2.3 IC1.6 | length 505.6
  Top Layer 1 w10: IC1.6 1118,1544.5 1118,1275 1083.46,1240.46 DS2.3
NetDS2_5: DS2.5 IC1.10 | length 661.3
  Top Layer 1 w10: DS2.5 1183.46,1050.34 1189.32,1044.48 1232.38,1044.48 1298.77,1110.87 1298.77,1437.63 IC1.10
NetDS2_6: DS2.6 IC1.12 | length 621.2
  Top Layer 1 w10: DS2.6 1233.46,1572.33 IC1.12
NetDS2_8: DS2.8 IC1.13 | length 1232.8
  Top Layer 1 w10: DS2.8 1183.46,826.51 1427.31,1070.36 1427.31,1776.21 1398.66,1804.86 1370.24,1804.86 IC1.13
NetDS2_9: DS2.9 R7.1 | length 281.8
  Top Layer 1 w10: R7.1 979.89,520.59 1050.66,591.37 1085.58,591.37 1133.46,639.25 DS2.9
NetDS2_10: DS2.10 IC1.9 | length 808.5
  Top Layer 1 w10: DS2.10 1083.46,785.7 1368.12,1070.36 IC1.9
NetDS2_11: DS2.11 IC1.11 | length 1080.1
  Top Layer 1 w10: DS2.11 1044.21,727.13 1044.21,791.83 1330.87,1078.49 1330.87,1422.41 1336.68,1428.22 1336.68,1441.51 1355.51,1460.33 1381.82,1460.33 1405.36,1483.88 1405.36,1577.65 1376.03,1606.98 IC1.11
NetDS3_1: DS3.1 IC2.7 | length 428.3
  Top Layer 1 w10: DS3.1 543.61,1222.08 642.53,1321 642.53,1454.14 IC2.7
NetDS3_3: DS3.3 IC2.6 | length 516.4
  Top Layer 1 w10: IC2.6 596.12,1600.56 615.94,1600.56 662.53,1553.97 662.53,1201.5 656.68,1195.64 654.36,1195.64 643.61,1184.89 DS3.3
NetDS3_5: DS3.5 IC2.10 | length 656.3
  Top Layer 1 w10: DS3.5 743.61,1050.34 749.47,1044.48 802.41,1044.48 832.14,1074.21 832.14,1436.84 IC2.10
NetDS3_6: DS3.6 IC2.12 | length 610.4
  Top Layer 1 w10: DS3.6 793.61,1598.31 IC2.12
NetDS3_8: DS3.8 IC2.13 | length 1217.9
  Top Layer 1 w10: DS3.8 743.61,803.61 960.68,1020.68 960.68,1068.35 952.72,1076.31 952.72,1298.57 960.68,1306.53 960.68,1528.79 952.72,1536.75 952.72,1767.84 924.27,1796.29 922.32,1796.29 911.62,1806.98 IC2.13
NetDS3_9: DS3.9 R11.1 | length 239
  Top Layer 1 w10: DS3.9 693.61,642.73 793.18,543.16 R11.1
NetDS3_10: DS3.10 IC2.9 | length 797.7
  Top Layer 1 w10: DS3.10 643.61,759.69 654.36,770.44 654.36,806.63 902.29,1054.56 IC2.9
NetDS3_11: DS3.11 IC2.11 | length 1058.6
  Top Layer 1 w10: DS3.11 604.36,727.13 604.36,803.3 860.67,1059.61 860.67,1418.03 895.78,1453.15 909.94,1453.15 940.68,1483.88 940.68,1520.5 932.72,1528.46 932.72,1529.23 902.29,1559.65 IC2.11
NetDS4_1: DS4.1 IC3.7 | length 406
  Top Layer 1 w10: DS4.1 105.44,1266.86 159.96,1321.38 159.96,1422.41 159.58,1422.79 159.58,1470.12 IC3.7
NetDS4_3: DS4.3 IC3.6 | length 502.3
  Top Layer 1 w10: IC3.6 205.44,1524.26 DS4.3
NetDS4_5: DS4.5 IC3.10 | length 669.7
  Top Layer 1 w10: DS4.5 305.44,1057.49 318.45,1044.48 388.43,1044.48 399.66,1055.71 399.66,1323.62 384.28,1339 384.28,1377.06 378.07,1383.27 378.07,1430.7 384.28,1436.91 384.28,1455.95 IC3.10
NetDS4_6: DS4.6 IC3.12 | length 601.1
  Top Layer 1 w10: DS4.6 355.44,1627.11 IC3.12
NetDS4_8: DS4.8 IC3.13 | length 1194.4
  Top Layer 1 w10: DS4.8 305.44,876.64 492.56,1063.76 492.56,1612.06 473.7,1630.92 473.7,1741.61 473.18,1742.13 473.18,1769.12 IC3.13
NetDS4_9: DS4.9 R15.2 | length 382.3
  Top Layer 1 w10: DS4.9 255.44,670.47 274.69,651.21 274.69,648.5 307.84,615.35 454.19,615.35 496.37,573.17 496.37,522.57 R15.2
NetDS4_10: DS4.10 IC3.9 | length 800.6
  Top Layer 1 w10: DS4.10 205.44,804.92 449.98,1049.47 449.98,1383.88 435.31,1398.55 IC3.9
NetDS4_11: DS4.11 IC3.11 | length 1061
  Top Layer 1 w10: DS4.11 155.44,783.2 419.66,1047.42 419.66,1369.97 398.07,1391.56 398.07,1422.41 432.06,1456.4 437.4,1456.4 472.56,1491.56 472.56,1569.74 IC3.11
NetIC1_5: IC1.5 R8.2 | length 567.3
  Top Layer 1 w10: R8.2 961.61,2106.39 v1(973.42,2094.58)
  Bottom Layer 1 w10: v1(973.42,2094.58) 1013.33,2054.67 1060.5,2054.67 1092.76,2022.41 1092.76,1744.23 IC1.5
NetIC2_5: IC2.5 R12.2 | length 777.5
  Top Layer 1 w10: R12.2 486.24,2181.83 486.24,2105.23 438.96,2057.96 416.04,2057.96 377.99,2019.92 377.99,2011.63 421.78,1967.85 616.29,1967.85 640,1944.14 640,1757.29 IC2.5
NetR2_2: R2.2 SW2.1 | length 158.1
  Top Layer 1 w10: R2.2 780.79,2406.21 810.65,2436.07 SW2.1
NetR5_2: R5.2 SW3.1 | length 138.5
  Top Layer 1 w10: SW3.1 582.82,2436.07 607.42,2411.48 R5.2
VCC: C2.1 C4.2 C8.2 C11.2 IC1.3 IC1.16 IC2.3 IC2.16 IC3.3 IC3.16 R1.1 R2.1 R5.1 U1.3 | length 1482.6
  Top Layer 1 w10: v1(417.32,2264.89) 417.32,2254.06 406.55,2243.29 406.55,2135.75 IC3.16 ; R5.1 662.53,2401.07 672.94,2411.48 705.5,2411.48 725.67,2391.31 R2.1 ; IC2.16 902.29,2187.14 C8.2 902.99,2260.22 v1(909.94,2267.17) ; C4.2 1376.53,2186.28 1398.66,2164.15 1398.66,2137.53 IC1.16 ; C2.1 1357.87,555.22 1336.68,576.41 1336.68,630.37 R1.1 1340.15,632.85 1350.74,622.26 1350.74,618.24 1365.13,603.85 1437.22,603.85 v1(1531.1,697.73) U1.3
  Bottom Layer 1 w10: IC2.16 982.44,2026.83 v1(982.44,1964.03) 1007.66,1938.8 1023.7,1938.8 IC1.3
  other v1: 1391.87,2170.95 689.22,2411.48
pads on no net: DS2.2 DS2.4 DS2.7 DS3.2 DS3.4 DS3.7 DS4.2 DS4.4 DS4.7 IC1.4 IC1.14 IC2.4 IC2.14 IC3.4 IC3.5 IC3.14 SW1.1

## Polygon pours and split planes (outlines as drawn)
GND on Layer 3 (GND) "GND_L03_P001" (solid, pour order 1): 0,0 1763,0 1763,964 1449,1278 1449,2600 0,2600
GND on Layer 3 (GND) "GND_L03_P000" (solid, pour order 0): 0,0 1763,0 1763,964 1449,1278 1449,2600 0,2600
VCC on Layer 2 (PWR) "VCC_L02_P002" (solid, pour order 2): 412.92,2458.55 128.51,2174.15 65.12,2174.15 65.12,1856.36 1186.25,1856.36 1307.87,1734.74 1307.87,1161.17 1307.87,596 1726.82,596 1726.82,968.32 1449,1246.14 1449,2203.93 1131.9,2458.55

## Silkscreen, mask and mechanical layers (free items; w line width, h text height)
Top 3D Body:
  text "RST" at 634.98,2487.49 h60 r90
  text "CLK" at 811.66,2483.07 h60 r90
  text "BOOT0" at 1501.88,678.81 h60 r90

## Text inside footprints (layer, text, board x,y; h text height)
C1: Top Overlay "+" at 1279.13,280.06 h59.06
C2: Top Overlay "+" at 1279.13,590.95 h59.06
J1: Top Designator "PCB Edge" at 823.56,19.13 h25.59